# EAGLE board ЛР 15. Цепочка сдвиговых регистров  (EAGLE 9.7.0)

Size 180.26 x 59.69 mm. Coordinates in mm from the lower left corner, seen from the top.
Outline: 0,0 180.26,0 180.26,59.69 0,59.69 0,0
Copper layers (1*16): Top 0.035mm / dielectric 1.5mm / Bottom 0.035mm
Design rules "default": minimum track width 6mil, minimum drill 0.35mm, track to track 6mil, track to pad 6mil, pad to pad 6mil, via to via 6mil, smd to smd 6mil, copper to edge 40mil, drill to drill 6mil, minimum pad ring 10mil, minimum via ring 8mil, stop-mask expansion 4mil, vias tented up to drill 0mil, thermal gap 10mil

## Footprints (pad centres in the part's own frame; a part is rotated, then mirrored left to right if it is on the bottom)
7SEG-13 = drill 0.813 long: 1 -5.08,-7.62; 2 -2.54,-7.62; 3 0,-7.62; 4 2.54,-7.62; 5 5.08,-7.62; 6 5.08,7.62; 7 2.54,7.62; 8 0,7.62; 9 -2.54,7.62; 10 -5.08,7.62
RESAD1016W63L850D250B = drill 0.83 pad 1.43: 1 -5.08,0; 2 5.08,0
DIP762W53P254L1969H508Q16B = drill 0.743 pad 1.343: 1 -3.81,8.89; 2 -3.81,6.35; 3 -3.81,3.81; 4 -3.81,1.27; 5 -3.81,-1.27; 6 -3.81,-3.81; 7 -3.81,-6.35; 8 -3.81,-8.89; 9 3.81,-8.89; 10 3.81,-6.35; 11 3.81,-3.81; 12 3.81,-1.27; 13 3.81,1.27; 14 3.81,3.81; 15 3.81,6.35; 16 3.81,8.89
ARDUINO-UNO-R3-SHIELD = drill 1.016 pad 1.88: 3.3V 24.13,-2.54; 5V 24.13,0; A0 24.13,12.7; A1 24.13,15.24; A2 24.13,17.78; A3 24.13,20.32; A4 24.13,22.86; A5 24.13,25.4; AREF -24.13,-13.97; D2 -24.13,20.32; D3 -24.13,17.78; D4 -24.13,15.24; D5 -24.13,12.7; D6 -24.13,10.16; D7 -24.13,7.62; D8 -24.13,3.81; D9 -24.13,1.27; D10 -24.13,-1.27; D11 -24.13,-3.81; D12 -24.13,-6.35; D13 -24.13,-8.89; GND@0 24.13,2.54; GND@1 24.13,5.08; GND@2 -24.13,-11.43; IOREF 24.13,-7.62; NC 24.13,-10.16; RES 24.13,-5.08; RX -24.13,25.4; SCL -24.13,-19.05; SDA -24.13,-16.51; TX -24.13,22.86; VIN 24.13,7.62

## Placement (x,y rotation side)
DIGIT1  7SEG-CK  [7SEG-13]  158.28,32.43 0 top
DIGIT2  7SEG-CK  [7SEG-13]  170.98,32.43 0 top
R1  220  [RESAD1016W63L850D250B]  158.28,14.65 90 top
R2  220  [RESAD1016W63L850D250B]  170.98,14.65 90 top
U1  74HC595_PDIP  [DIP762W53P254L1969H508Q16B]  129.07,28.62 90 top
U2  ARDUINO-UNO-R3-SHIELD  [ARDUINO-UNO-R3-SHIELD]  47.88,29.84 270 top
U3  74HC595_PDIP  [DIP762W53P254L1969H508Q16B]  108.75,28.62 90 top

## Library data of the parts
DIGIT1 DIGIT2 = Tinkercad; CATEGORY: Opto-Electronic; SUB-CATEGORY: Display; TYPE: 7-Segment
R1 R2 U1-U3 = Tinkercad

## Nets
DIGIT1_CK1: DIGIT1.3 R1.2
DIGIT2_CK1: DIGIT2.3 R2.2
U1_Q0: DIGIT1.7 U1.15
U1_Q1: DIGIT1.6 U1.1
U1_Q2: DIGIT1.4 U1.2
U1_Q3: DIGIT1.2 U1.3
U1_Q4: DIGIT1.1 U1.4
U1_Q5: DIGIT1.9 U1.5
U1_Q6: DIGIT1.10 U1.6
U1_Q7: DIGIT1.5 U1.7
U2_5V: U1.10 U1.16 U2.5V U3.10 U3.16
U2_D3: U2.D3 U3.11
U2_D4: U2.D4 U3.12
U2_D5: U2.D5 U3.14
U2_D9: U1.11 U2.D9
U2_D10: U1.12 U2.D10
U2_D11: U1.14 U2.D11
U2_GND: R1.1 R2.1 U1.8 U1.13 U2.GND@0 U2.GND@1 U2.GND@2 U3.8 U3.13
U3_Q0: DIGIT2.7 U3.15
U3_Q1: DIGIT2.6 U3.1
U3_Q2: DIGIT2.4 U3.2
U3_Q3: DIGIT2.2 U3.3
U3_Q4: DIGIT2.1 U3.4
U3_Q5: DIGIT2.9 U3.5
U3_Q6: DIGIT2.10 U3.6
U3_Q7: DIGIT2.5 U3.7

## Tracks (layer width: path | path; a pad name or v marks a point on that pad's centre or on a via)
DIGIT1_CK1  (1 unrouted)
DIGIT2_CK1  (1 unrouted)
U1_Q0  (1 unrouted)
U1_Q1  (1 unrouted)
U1_Q2  (1 unrouted)
U1_Q3  (1 unrouted)
U1_Q4  (1 unrouted)
U1_Q5  (1 unrouted)
U1_Q6  (1 unrouted)
U1_Q7  (1 unrouted)
U2_5V  (4 unrouted)
U2_D3  (1 unrouted)
U2_D4  (1 unrouted)
U2_D5  (1 unrouted)
U2_D9  (1 unrouted)
U2_D10  (1 unrouted)
U2_D11  (1 unrouted)
U2_GND  (8 unrouted)
U3_Q0  (1 unrouted)
U3_Q1  (1 unrouted)
U3_Q2  (1 unrouted)
U3_Q3  (1 unrouted)
U3_Q4  (1 unrouted)
U3_Q5  (1 unrouted)
U3_Q6  (1 unrouted)
U3_Q7  (1 unrouted)